# EAGLE board MCPTQFP100 (EAGLE 5.11)
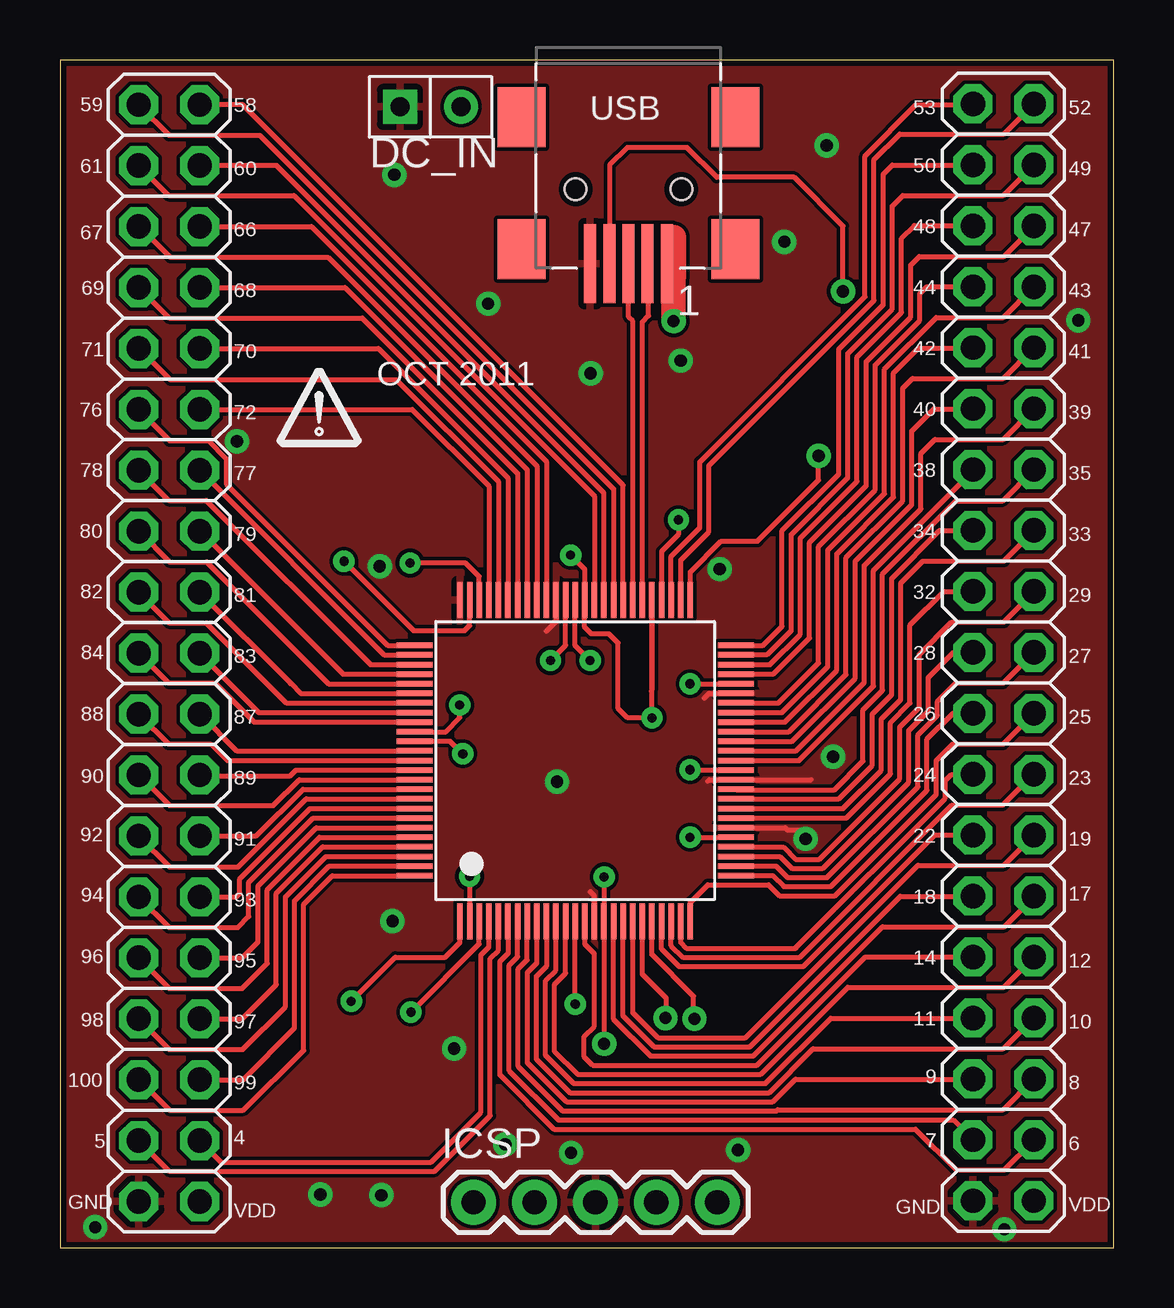
[diagram p0: board, top side]
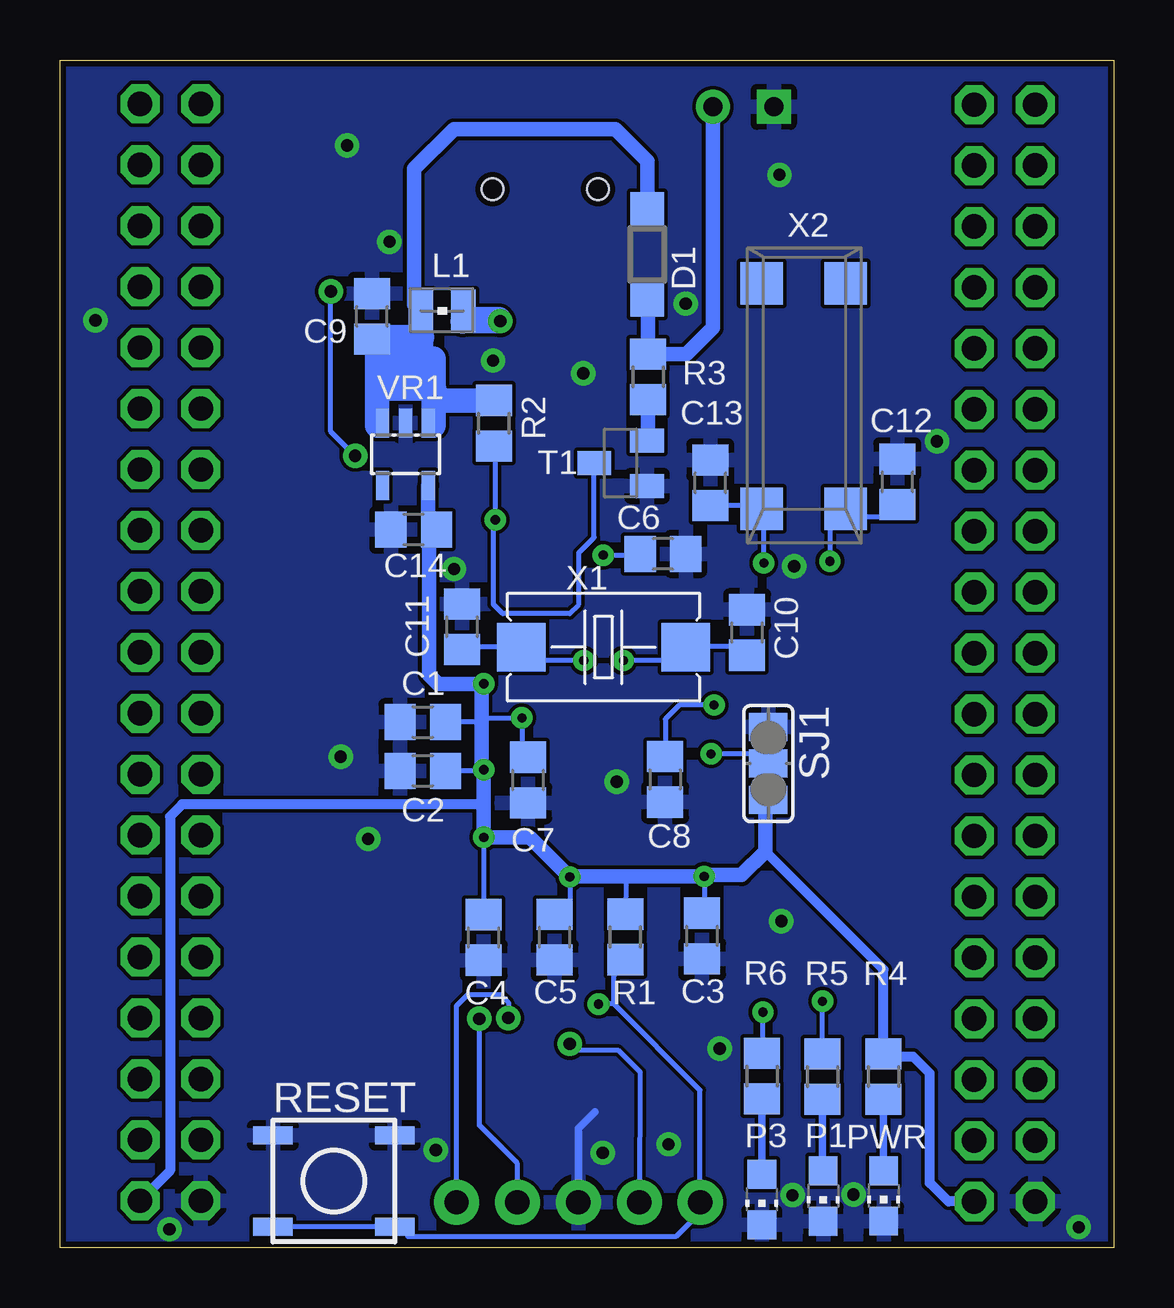
[diagram p1: board, bottom side, seen from below]

Size 43.93 x 49.52 mm. Coordinates in mm from the lower left corner, seen from the top.
Outline: 0,0 43.93,0 43.93,49.52 0,49.52 0,0
Copper layers (1*16): Top 0.035mm / dielectric 1.5mm / Bottom 0.035mm
Design rules "SparkFun *": minimum track width 6mil, minimum drill 15mil, track to track 6mil, track to pad 6mil, pad to pad 6mil, via to via 6mil, smd to smd 6mil, copper to edge 10mil, drill to drill 8mil, minimum pad ring 12mil, minimum via ring 10mil, stop-mask expansion 4mil, vias tented up to drill 25mil, thermal gap 10mil

## Footprints (pad centres in the part's own frame; a part is rotated, then mirrored left to right if it is on the bottom)
C805 = smd 1.3 x 1.5: 1 -0.95,0; 2 0.95,0
SOD123 = smd 1.4 x 1.4: A 1.9,0; C -1.9,0
M1X2 = drill 0.8 square: 1 -1.27,0 | drill 0.8 round: 2 1.27,0
DP_DEVICES_TQFP100-12MMX12MM = smd 0.23 x 1.5: P1 -4.8,-6.7; P2 -4.4,-6.7; P3 -4,-6.7; P4 -3.6,-6.7; P5 -3.2,-6.7; P6 -2.8,-6.7; P7 -2.4,-6.7; P8 -2,-6.7; P9 -1.6,-6.7; P10 -1.2,-6.7; P11 -0.8,-6.7; P12 -0.4,-6.7; P13 0,-6.7; P14 0.4,-6.7; P15 0.8,-6.7; P16 1.2,-6.7; P17 1.6,-6.7; P18 2,-6.7; P19 2.4,-6.7; P20 2.8,-6.7; P21 3.2,-6.7; P22 3.6,-6.7; P23 4,-6.7; P24 4.4,-6.7; P25 4.8,-6.7; P51 4.8,6.7; P52 4.4,6.7; P53 4,6.7; P54 3.6,6.7; P55 3.2,6.7; P56 2.8,6.7; P57 2.4,6.7; P58 2,6.7; P59 1.6,6.7; P60 1.2,6.7; P61 0.8,6.7; P62 0.4,6.7; P63 0,6.7; P64 -0.4,6.7; P65 -0.8,6.7; P66 -1.2,6.7; P67 -1.6,6.7; P68 -2,6.7; P69 -2.4,6.7; P70 -2.8,6.7; P71 -3.2,6.7; P72 -3.6,6.7; P73 -4,6.7; P74 -4.4,6.7; P75 -4.8,6.7 | smd 1.5 x 0.23: P26 6.7,-4.8; P27 6.7,-4.4; P28 6.7,-4; P29 6.7,-3.6; P30 6.7,-3.2; P31 6.7,-2.8; P32 6.7,-2.4; P33 6.7,-2; P34 6.7,-1.6; P35 6.7,-1.2; P36 6.7,-0.8; P37 6.7,-0.4; P38 6.7,0; P39 6.7,0.4; P40 6.7,0.8; P41 6.7,1.2; P42 6.7,1.6; P43 6.7,2; P44 6.7,2.4; P45 6.7,2.8; P46 6.7,3.2; P47 6.7,3.6; P48 6.7,4; P49 6.7,4.4; P50 6.7,4.8; P76 -6.7,4.8; P77 -6.7,4.4; P78 -6.7,4; P79 -6.7,3.6; P80 -6.7,3.2; P81 -6.7,2.8; P82 -6.7,2.4; P83 -6.7,2; P84 -6.7,1.6; P85 -6.7,1.2; P86 -6.7,0.8; P87 -6.7,0.4; P88 -6.7,0; P89 -6.7,-0.4; P90 -6.7,-0.8; P91 -6.7,-1.2; P92 -6.7,-1.6; P93 -6.7,-2; P94 -6.7,-2.4; P95 -6.7,-2.8; P96 -6.7,-3.2; P97 -6.7,-3.6; P98 -6.7,-4; P99 -6.7,-4.4; P100 -6.7,-4.8
1X05 = drill 1.016 pad 1.88 round: 1 0,0; 2 2.54,0; 3 5.08,0; 4 7.62,0; 5 10.16,0
2X19 = drill 1.016 octagon: 1 -22.86,-1.27; 2 -22.86,1.27; 3 -20.32,-1.27; 4 -20.32,1.27; 5 -17.78,-1.27; 6 -17.78,1.27; 7 -15.24,-1.27; 8 -15.24,1.27; 9 -12.7,-1.27; 10 -12.7,1.27; 11 -10.16,-1.27; 12 -10.16,1.27; 13 -7.62,-1.27; 14 -7.62,1.27; 15 -5.08,-1.27; 16 -5.08,1.27; 17 -2.54,-1.27; 18 -2.54,1.27; 19 0,-1.27; 20 0,1.27; 21 2.54,-1.27; 22 2.54,1.27; 23 5.08,-1.27; 24 5.08,1.27; 25 7.62,-1.27; 26 7.62,1.27; 27 10.16,-1.27; 28 10.16,1.27; 29 12.7,-1.27; 30 12.7,1.27; 31 15.24,-1.27; 32 15.24,1.27; 33 17.78,-1.27; 34 17.78,1.27; 35 20.32,-1.27; 36 20.32,1.27; 37 22.86,-1.27; 38 22.86,1.27
WE-KI_0805_B = smd 1.02 x 1.78: 1 -0.89,0; 2 0.89,0
CHIP-LED0805 = smd 1.2 x 1.2: A 0,-1.05; C 0,1.05
R805 = smd 1.3 x 1.5: 1 -0.95,0; 2 0.95,0
TACT_SWITCH_SMALL = smd 1.651 x 0.762: 1 -2.54,1.905; 2 2.54,1.905; 3 -2.54,-1.905; 4 2.54,-1.905
SJ_2 = smd 1.168 x 1.6: 1 -1.524,0; 2 0,0; 3 1.524,0
SOT23-EBC = smd 1 x 1.4: B 0.95,-1.1; C 0,1.1; E -0.95,-1.1
CONN_USB_MINI-B = smd 2 x 2.5: BODY@1 -4.45,2.5; BODY@2 4.45,2.5; BODY@3 4.45,-3; BODY@4 -4.45,-3 | smd 0.5 x 3.3: D+ 0,3.1; D- -0.8,3.1; GND 1.6,3.1; ID 0.8,3.1; VUSB -1.6,3.1 | hole 0.9: -2.2,0; 2.2,0
SOT-23-5 = smd 0.55 x 1.2: 1 -0.95,-1.3; 2 0,-1.3; 3 0.95,-1.3; 4 0.95,1.3; 5 -0.95,1.3
5X8 = smd 2.032 x 2.032: 1 -3.429,0; 2 3.429,0
CM309S = smd 1.778 x 1.778: 1 -4.7,-1.75; 2 4.7,-1.75; 3 4.7,1.75; 4 -4.7,1.75

## Placement (x,y rotation side)
C1  0.1uF  [C805]  28.8,21.92 0 bottom
C2  0.1uF  [C805]  28.8,19.89 0 bottom
C3  0.1uF  [C805]  17.16,13 90 bottom
C4  0.1uF  [C805]  26.26,12.95 90 bottom
C5  0.1uF  [C805]  23.31,12.95 90 bottom
C6  0.1uF  [C805]  18.8,28.93 180 bottom
C7  0.1uF  [C805]  24.41,19.51 90 bottom
C8  10uF  [C805]  18.7,19.53 270 bottom
C9  10uF  [C805]  30.92,38.83 90 bottom
C10  10uF  [C805]  15.28,25.65 90 bottom
C11  10uF  [C805]  27.17,25.9 90 bottom
C12  10uF  [C805]  9.02,31.93 90 bottom
C13  10uF  [C805]  16.82,31.9 90 bottom
C14  1uF  [C805]  29.18,29.94 180 bottom
D1  [SOD123]  19.45,41.41 270 bottom
DC_IN  HEADER1X2PTH  [M1X2]  15.44,47.57 0 top
IC1  PIC24FJ256GB210  [DP_DEVICES_TQFP100-12MMX12MM]  21.48,20.32 0 top
ICSP  [1X05]  17.24,1.91 0 top
JP1  [2X19]  39.33,24.83 270 top
JP2  [2X19]  4.55,24.8 270 top
L1  [WE-KI_0805_B]  28,39.06 0 bottom
P1  P4  [CHIP-LED0805]  12.12,2.17 180 bottom
P3  P4  [CHIP-LED0805]  14.67,2.02 180 bottom
PWR  P4  [CHIP-LED0805]  9.6,2.17 180 bottom
R1  2K  [R805]  20.36,12.97 90 bottom
R2  100k  [R805]  25.84,34.38 270 bottom
R3  2k  [R805]  19.42,36.32 270 bottom
R4  300  [R805]  9.6,7.14 90 bottom
R5  300  [R805]  12.14,7.14 90 bottom
R6  300  [R805]  14.67,7.16 90 bottom
RESET  [TACT_SWITCH_SMALL]  32.51,2.79 0 bottom
SJ1  [SJ_2]  14.4,20.19 270 bottom
T1  [SOT23-EBC]  20.56,32.72 90 bottom
U$1  DINA4_L  [DP_LOGO]  10.79,34.04 0 top
USB  CON-USB-MINI-BUSB1  [CONN_USB_MINI-B]  23.7,44.13 180 top
VR1  [SOT-23-5]  29.53,33.08 180 bottom
X1  OSC-XTAL28M_  [5X8]  21.27,25.04 180 bottom
X2  OSC-32.768  [CM309S]  12.93,35.51 90 bottom

## Library data of the parts
C1-C14 DC_IN R1-R6 RESET T1 U$1 USB VR1 X1 = dp_devices
D1 = diode
IC1 JP1 JP2 X2 = fica
ICSP = SparkFun
L1 = wuerth-elektronik
P1 P3 PWR = led
SJ1 = jumper

## Nets
1: IC1.P1 R5.2
3: IC1.P3 R6.2
4: IC1.P4 JP2.36
5: IC1.P5 JP2.35
6: IC1.P6 JP1.36
7: IC1.P7 JP1.35
8: IC1.P8 JP1.34
9: IC1.P9 JP1.33
10: IC1.P10 JP1.32
11: IC1.P11 JP1.31
12: IC1.P12 JP1.30
14: IC1.P14 JP1.29
17: IC1.P17 JP1.28
18: IC1.P18 JP1.27
19: IC1.P19 JP1.26
22: IC1.P22 JP1.25
23: IC1.P23 JP1.24
24: IC1.P24 JP1.23
25: IC1.P25 JP1.22
26: IC1.P26 JP1.21
27: IC1.P27 JP1.20
28: IC1.P28 JP1.19
29: IC1.P29 JP1.18
32: IC1.P32 JP1.17
33: IC1.P33 JP1.16
34: IC1.P34 JP1.15
35: IC1.P35 JP1.14
38: IC1.P38 JP1.13
39: IC1.P39 JP1.12
40: IC1.P40 JP1.11
41: IC1.P41 JP1.10
42: IC1.P42 JP1.9
43: IC1.P43 JP1.8
44: IC1.P44 JP1.7
47: IC1.P47 JP1.6
48: IC1.P48 JP1.5
49: IC1.P49 JP1.4
50: IC1.P50 JP1.3
52: IC1.P52 JP1.2
53: IC1.P53 JP1.1
58: IC1.P58 JP2.2
59: IC1.P59 JP2.1
60: IC1.P60 JP2.4
61: IC1.P61 JP2.3
66: IC1.P66 JP2.6
67: IC1.P67 JP2.5
68: IC1.P68 JP2.8
69: IC1.P69 JP2.7
70: IC1.P70 JP2.10
71: IC1.P71 JP2.9
72: IC1.P72 JP2.12
76: IC1.P76 JP2.11
77: IC1.P77 JP2.14
78: IC1.P78 JP2.13
79: IC1.P79 JP2.16
80: IC1.P80 JP2.15
81: IC1.P81 JP2.18
82: IC1.P82 JP2.17
83: IC1.P83 JP2.20
84: IC1.P84 JP2.19
87: IC1.P87 JP2.22
88: IC1.P88 JP2.21
89: IC1.P89 JP2.24
90: IC1.P90 JP2.23
91: IC1.P91 JP2.26
92: IC1.P92 JP2.25
93: IC1.P93 JP2.28
94: IC1.P94 JP2.27
95: IC1.P95 JP2.30
96: IC1.P96 JP2.29
97: IC1.P97 JP2.32
98: IC1.P98 JP2.31
99: IC1.P99 JP2.34
100: IC1.P100 JP2.33
D+: IC1.P57 USB.D+
D-: IC1.P56 USB.D-
DCIN: D1.A DC_IN.2 R3.1
GND: C1.1 C2.1 C3.1 C4.1 C5.1 C6.1 C7.1 C8.2 C9.2 C10.2 C11.2 C12.2 C13.2 C14.2 DC_IN.1 IC1.P15 IC1.P31 IC1.P36 IC1.P45 IC1.P65 IC1.P75 ICSP.3 JP1.37 JP2.37 P1.C P3.C PWR.C RESET.1 RESET.2 SJ1.1 T1.E USB.GND VR1.2
N$1: C8.1 IC1.P85
N$2: R3.2 T1.B
N$3: IC1.P86 SJ1.2
N$6: PWR.A R4.1
N$7: P1.A R5.1
N$8: P3.A R6.1
OSCI: C11.1 IC1.P63 X1.2
OSCO: C10.1 IC1.P64 X1.1
PGC: IC1.P20 ICSP.5
PGD: IC1.P21 ICSP.4
SOSCI: C13.1 IC1.P73 X2.4
SOSCO: C12.1 IC1.P74 X2.1
USBID: IC1.P51 USB.ID
VBUS: IC1.P54 R2.2 T1.C
VDD: C1.2 C2.2 C3.2 C4.2 C5.2 C6.2 C7.2 C14.1 IC1.P2 IC1.P16 IC1.P30 IC1.P37 IC1.P46 IC1.P55 IC1.P62 ICSP.2 JP1.38 JP2.38 R1.2 R4.2 SJ1.3 VR1.5
VUSB: C9.1 D1.C L1.1 R2.1 VR1.1 VR1.3
VUSBO: L1.2 USB.VUSB
~MCLR: IC1.P13 ICSP.1 R1.1 RESET.3 RESET.4

## Tracks (layer width: path | path; a pad name or v marks a point on that pad's centre or on a via)
1  (via drill 0.38)
  Top 0.203: IC1.P1 16.68,12.74 16.05,12.12 13.97,12.12 v12.14,10.29
  Bottom 0.203: R5.2 v12.14,10.29
3  (via drill 0.38)
  Top 0.203: IC1.P3 17.48,12.68 v14.63,9.83
  Bottom 0.203: v14.63,9.83 14.63,8.15 R6.2
4
  Top 0.203: IC1.P4 17.88,12.54 17.55,12.22 17.55,5.66 15.47,3.58 6.72,3.58 JP2.36
5
  Top 0.203: IC1.P5 18.28,12.41 17.93,12.07 17.93,5.51 15.62,3.2 4.55,3.2 JP2.35
6
  Top 0.203: JP1.36 40.6,4.48 39.37,3.25 37.36,3.25 35.66,4.95 20.6,4.95 18.34,7.21 18.34,11.94 18.69,12.29 18.69,13.6 IC1.P6
7
  Top 0.203: IC1.P7 19.08,12.14 18.72,11.79 18.72,7.39 20.78,5.33 37.23,5.33 JP1.35
8
  Top 0.203: JP1.34 39.32,5.77 29.92,5.77 29.87,5.72 20.96,5.72 19.1,7.57 19.1,11.63 19.48,12.01 IC1.P8
9
  Top 0.203: IC1.P9 19.88,11.87 19.48,11.48 19.48,7.72 21.11,6.1 29.72,6.1 30.66,7.04 38.04,7.04 JP1.33
10
  Top 0.203: JP1.32 39.32,8.31 31.39,8.31 29.57,6.48 21.26,6.48 19.86,7.87 19.86,11.33 20.29,11.76 20.29,13.6 IC1.P10
11
  Top 0.203: IC1.P11 20.68,11.58 20.24,11.15 20.24,8.03 21.41,6.86 29.41,6.86 32.13,9.58 38.04,9.58 JP1.31
12
  Top 0.203: IC1.P12 21.08,11.45 20.63,11 20.63,8.18 21.56,7.24 29.21,7.24 32.84,10.87 39.34,10.87 JP1.30
14
  Top 0.203: JP1.29 33.57,12.13 29.06,7.62 22.2,7.62 21.84,7.98 21.84,8.81 22.28,9.25 22.28,12.27 21.9,12.65 21.9,13.6 IC1.P14
17
  Top 0.203: IC1.P17 23.08,9.54 24.61,8 28.91,8 34.29,13.39 39.37,13.39 40.6,14.61 JP1.28
18
  Top 0.203: IC1.P18 23.48,9.67 24.77,8.38 28.75,8.38 35.03,14.66 38.04,14.66 JP1.27
19
  Top 0.203: IC1.P19 23.88,9.8 24.92,8.76 28.58,8.76 35.76,15.95 39.34,15.95 JP1.26
22
  Top 0.203: JP1.25 36.46,17.21 30.99,11.73 25.81,11.73 25.07,12.47 IC1.P22
23
  Top 0.203: JP1.24 40.58,19.75 39.29,18.47 37.19,18.47 30.84,12.12 25.96,12.12 25.48,12.6 IC1.P23
24
  Top 0.203: IC1.P24 25.88,12.73 26.11,12.5 30.68,12.5 30.68,12.52 36.91,18.75 36.91,19.48 37.16,19.74 38.04,19.74 JP1.23
25
  Top 0.203: IC1.P25 26.28,14.41 27,15.14 29.54,15.14 30,14.68 32.31,14.68 36.53,18.9 36.53,20.32 37.21,21.01 39.32,21.01 JP1.22
26
  Top 0.203: IC1.P26 29.72,15.52 30.18,15.06 32.13,15.06 36.14,19.08 36.14,21.21 37.24,22.3 38.04,22.3 JP1.21
27
  Top 0.203: JP1.20 39.32,23.55 37.34,23.55 36.58,22.78 36.58,22.2 35.76,21.39 35.76,19.23 31.98,15.44 30.33,15.44 29.85,15.92 IC1.P27
28
  Top 0.203: IC1.P28 30.01,16.32 30.51,15.82 31.8,15.82 35.38,19.41 35.38,21.56 36.2,22.38 36.2,23.77 37.26,24.84 38.04,24.84 JP1.19
29
  Top 0.203: JP1.18 40.6,27.34 39.34,26.09 37.16,26.09 35.81,24.74 35.81,22.53 35,21.72 35,19.56 31.65,16.21 30.66,16.21 30.15,16.71 IC1.P29
32
  Top 0.203: IC1.P32 32.78,17.92 34.62,19.76 34.62,21.89 35.43,22.71 35.43,25.96 36.84,27.37 JP1.17
33
  Top 0.203: JP1.16 40.6,29.88 39.34,28.63 35.97,28.63 35.05,27.71 35.05,22.86 34.24,22.05 34.24,19.91 32.64,18.31 IC1.P33
34
  Top 0.203: JP1.15 36.67,29.91 34.67,27.91 34.67,23.06 33.86,22.25 33.86,20.12 32.46,18.72 IC1.P34
  Top 0.305: JP1.15 38.02,29.94
35
  Top 0.203: JP1.14 39.29,31.14 37.34,31.14 34.29,28.09 34.29,23.24 33.48,22.43 33.48,20.29 32.28,19.1 28.2,19.1 IC1.P35
38
  Top 0.203: IC1.P38 30.81,20.32 33.91,23.42 33.91,28.24 38.13,32.46 38.04,32.46 JP1.13
39
  Top 0.203: JP1.12 39.32,33.71 36.47,33.71 35.89,33.12 35.89,30.81 33.53,28.45 33.53,23.57 30.68,20.73 28.18,20.73 IC1.P39
40
  Top 0.203: IC1.P40 30.52,21.12 33.15,23.75 33.15,28.63 35.51,30.99 35.51,34.06 36.42,34.98 38.04,34.98 JP1.11
41
  Top 0.203: JP1.10 39.32,36.25 35.53,36.25 35.13,35.84 35.13,31.14 32.77,28.78 32.77,23.9 30.38,21.51 IC1.P41
42
  Top 0.203: IC1.P42 30.23,21.92 32.39,24.08 32.39,28.93 34.75,31.29 34.75,36.47 35.79,37.52 38.04,37.52 JP1.9
43
  Top 0.203: IC1.P43 30.09,22.32 32,24.23 32,29.08 34.37,31.45 34.37,36.63 36.53,38.79 39.32,38.79 JP1.8
44
  Top 0.203: JP1.7 36.13,40.07 35.84,39.78 35.84,38.66 33.99,36.8 33.99,31.6 31.62,29.24 31.62,24.38 29.95,22.71 IC1.P44
47
  Top 0.203: JP1.6 40.6,42.58 39.34,41.33 35.81,41.33 35.46,40.97 35.46,38.81 33.6,36.96 33.6,31.78 31.24,29.41 31.24,25.43 29.74,23.93 IC1.P47
48
  Top 0.203: IC1.P48 29.6,24.32 30.86,25.58 30.86,29.59 33.22,31.95 33.22,37.13 35.08,38.99 35.08,42.09 35.61,42.62 38.04,42.62 JP1.5
49
  Top 0.203: JP1.4 39.32,43.87 35.13,43.87 34.7,43.43 34.7,39.14 32.84,37.29 32.84,32.11 30.48,29.74 30.48,25.73 29.49,24.74 28.2,24.74 IC1.P49
50
  Top 0.203: IC1.P50 29.31,25.12 30.1,25.91 30.1,29.9 32.46,32.26 32.46,37.47 34.32,39.32 34.32,44.75 34.7,45.14 38.04,45.14 JP1.3
52
  Top 0.203: JP1.2 39.34,46.43 35,46.43 33.93,45.36 33.93,39.5 27.05,32.61 27.05,29.85 25.88,28.68 25.88,27.03 IC1.P52
53
  Top 0.203: IC1.P53 25.48,28.83 26.67,30.02 26.67,32.77 33.55,39.65 33.55,45.52 35.69,47.65 38.02,47.65 JP1.1
58
  Top 0.203: JP2.2 7.61,47.66 23.48,31.79 IC1.P58
59
  Top 0.203: JP2.1 3.28,47.64 4.55,46.38 8.33,46.38 23.08,31.64 IC1.P59
60
  Top 0.203: JP2.4 9.04,45.12 22.68,31.48 IC1.P60
61
  Top 0.203: JP2.3 4.52,43.87 9.75,43.87 22.28,31.34 IC1.P61
66
  Top 0.203: JP2.6 10.48,42.58 20.28,32.79 IC1.P66
67
  Top 0.203: IC1.P67 19.88,32.6 11.18,41.3 4.6,41.3 3.32,42.58 JP2.5
68
  Top 0.203: JP2.8 11.88,40.04 19.48,32.44 IC1.P68
69
  Top 0.203: JP2.7 4.55,38.76 12.6,38.76 19.08,32.28 IC1.P69
70
  Top 0.203: IC1.P70 18.68,32.1 13.28,37.5 JP2.10
71
  Top 0.203: JP2.9 3.3,37.5 4.6,36.2 14.02,36.2 18.28,31.94 IC1.P71
72
  Top 0.203: IC1.P72 17.88,31.76 14.68,34.95 JP2.12
76
  Top 0.203: JP2.11 3.28,34.94 4.57,33.66 6.17,33.66 6.93,32.89 6.93,31.85 13.67,25.12 IC1.P76
77
  Top 0.203: IC1.P77 13.52,24.72 JP2.14
78
  Top 0.203: JP2.13 3.28,32.4 4.52,31.17 6.1,31.17 12.94,24.32 IC1.P78
79
  Top 0.203: JP2.16 5.84,29.88 11.79,23.92 IC1.P79
80
  Top 0.203: JP2.15 3.3,29.88 4.57,28.6 6.12,28.6 11.2,23.52 IC1.P80
81
  Top 0.203: JP2.18 5.82,27.32 9.63,23.52 | 9.63,23.52 9.6,23.52 | IC1.P81 10.03,23.12 9.63,23.52
82
  Top 0.203: JP2.17 3.28,27.32 4.55,26.06 6.1,26.06 9.44,22.72 IC1.P82
83
  Top 0.203: JP2.20 8.29,22.32 IC1.P83
84
  Top 0.203: IC1.P84 8.1,21.92 6.48,23.55 4.53,23.55 JP2.19
87
  Top 0.203: JP2.22 5.84,22.26 7.37,20.72 IC1.P87
88
  Top 0.203: JP2.21 4.52,21.01 6.3,21.01 6.99,20.32 IC1.P88
89
  Top 0.203: IC1.P89 9.84,19.92 9.6,19.69 5.86,19.69 JP2.24
90
  Top 0.203: JP2.23 3.3,19.72 4.57,18.44 8.89,18.44 9.97,19.52 IC1.P90
91
  Top 0.203: IC1.P91 10.13,19.12 8.19,17.18 JP2.26
92
  Top 0.203: JP2.25 3.28,17.16 4.57,15.88 7.42,15.88 10.26,18.72 IC1.P92
93
  Top 0.203: JP2.28 7.35,14.64 7.49,14.78 7.49,15.39 10.42,18.32 IC1.P93
94
  Top 0.203: JP2.27 4.55,13.36 7.42,13.36 7.87,13.82 7.87,15.24 10.55,17.92 IC1.P94
95
  Top 0.203: IC1.P95 10.69,17.52 8.26,15.09 8.26,12.75 7.59,12.09 JP2.30
96
  Top 0.203: IC1.P96 10.82,17.12 8.64,14.94 8.64,11.86 7.59,10.82 4.55,10.82 3.28,12.08 JP2.29
97
  Top 0.203: IC1.P97 10.95,16.72 9.02,14.78 9.02,10.97 7.6,9.56 JP2.32
98
  Top 0.203: IC1.P98 11.09,16.32 9.4,14.63 9.4,10.06 7.62,8.28 4.55,8.28 JP2.31
99
  Top 0.203: IC1.P99 11.22,15.92 9.78,14.48 9.78,9.17 7.63,7.02 JP2.34
100
  Top 0.203: JP2.33 3.3,7.02 4.57,5.74 7.65,5.74 10.16,8.23 10.16,14.33 11.35,15.52 IC1.P100
D+
  Top 0.203: IC1.P57 23.88,38.63 23.7,38.81 USB.D+
D-
  Top 0.203: IC1.P56 24.28,38.6 24.54,38.86 24.54,41.02
  Top 0.254: 24.54,41.02 USB.D-
DCIN
  Bottom 0.61: DC_IN.2 16.71,38.35 17.81,37.26 R3.1 | R3.1 | R3.1 19.41,39.48 D1.A
GND  (via drill 0.51)
  Top 0.203: IC1.P31 30.23,17.52 30.33,17.42 30.84,17.42 31.16,17.1 | 31.32,19.52 IC1.P36 27.06,19.52 27,19.46 | IC1.P45 27.06,23.12 26.85,22.91 | IC1.P15 22.28,14.68 22.1,14.86 | IC1.P65 20.68,26.11 20.27,25.7 | 37.8,1.71 JP1.37
  Bottom 0.305: 21.62,5.68 22.32,4.98 ICSP.3
  other vias: 30.19,41.94 31.96,45.95 13.33,28.42 13.94,44.74 20.72,19.44 42.45,38.67 32.23,20.48 31.08,17.05 28.26,4.08 1.47,0.87 21.3,3.97 18.56,4.32 16.43,8.31 13.86,13.62 22.12,36.46 27.5,28.3 25.88,36.99 10.85,2.23 7.37,33.62 17.85,39.36 13.39,2.2 39.36,0.78
  pour Top: -0.13,49.53 43.94,49.53 43.94,0 -0.13,0
  pour Bottom: 43.94,49.53 43.94,0 -0.13,0 -0.13,49.53
N$1  (via drill 0.38)
  Top 0.203: IC1.P85 16.08,21.52 16.66,22.1 v16.66,22.63
  Bottom 0.203: 16.66,22.58 v16.66,22.63 18.11,22.63 18.69,22.05 C8.1
N$2
  Bottom 0.61: R3.2 19.42,33.71 T1.B
N$3  (via drill 0.38)
  Top 0.203: IC1.P86 16.27,21.12 v16.79,20.6
  Bottom 0.203: v16.79,20.6 14.81,20.6 SJ1.2
N$6
  Bottom 0.305: PWR.A 9.6,3.44 R4.1
N$7
  Bottom 0.305: R5.1 12.14,3.31 P1.A
N$8
  Bottom 0.305: P3.A 14.67,4.51 R6.1
OSCI  (via drill 0.38)
  Top 0.203: IC1.P63 21.48,25.11 v22.1,24.49
  Bottom 0.203: v22.1,24.49 24.14,24.49 X1.2 26.48,25.04 C11.1
OSCO  (via drill 0.38)
  Top 0.203: IC1.P64 21.08,25.11 v20.45,24.49
  Bottom 0.203: v20.45,24.49 18.4,24.49 X1.1 17.82,25.07 15.65,25.07 C10.1
PGC  (via drill 0.51)
  Top 0.203: IC1.P20 24.28,11.41 25.27,10.41 25.27,9.62 v25.24,9.59
  Bottom 0.203: ICSP.5 27.4,10.08 26.92,10.57 25.58,10.57 25.24,10.23 v25.24,9.59
PGD  (via drill 0.51)
  Top 0.203: IC1.P21 24.68,12.23 26.42,10.49 26.42,9.59 v26.45,9.56
  Bottom 0.203: ICSP.4 24.86,3.02 24.86,3.52 26.45,5.11 v26.45,9.56
SOSCI  (via drill 0.38)
  Top 0.203: IC1.P73 17.48,27.99 16.92,28.55 v14.59,28.55
  Bottom 0.203: X2.4 | C13.1 14.82,30.95 X2.4 | v14.59,28.55 14.59,30.72 X2.4
SOSCO  (via drill 0.38)
  Top 0.203: IC1.P74 17.08,25.94 16.87,25.73 14.73,25.73 v11.84,28.63
  Bottom 0.203: v11.84,28.63 11.84,30.15 X2.1 10.85,30.48 9.53,30.48 C12.1
USBID  (via drill 0.51 pad 1.02)
  Top 0.203: IC1.P51 26.28,28.18 27.56,29.46 29.08,29.46 31.62,32 v31.62,33.02 | v32.64,39.88 32.64,42.6 30.61,44.63 27.38,44.63 26.14,45.87 23.65,45.87 22.91,45.14 22.91,41.83 23.04,41.71 23.04,41.17 USB.ID
  Bottom 0.203: v32.64,39.88 32.64,34.04 v31.62,33.02
VBUS  (via drill 0.38)
  Top 0.203: IC1.P54 25.08,29.04 25.78,29.74 v25.78,30.35
  Bottom 0.203: v25.78,30.35 25.78,33.37 R2.2 | T1.C 21.66,29.62 22.3,28.98 22.3,26.82 22.68,26.44 25.48,26.44 25.86,26.82 25.86,30.28 v25.78,30.35 | v25.78,30.35 25.81,30.33
VDD  (via drill 0.38, 0.51)
  Top 0.203: IC1.P46 26.7,23.52 v26.26,23.52 | IC1.P37 26.28,19.92 v26.26,19.94 | IC1.P30 v26.26,17.12 | v22.68,15.47 v22.68,15.46 IC1.P16 v22.68,8.52 v22.68,8.51 | IC1.P2 v17.08,15.49 v17.07,15.49 | v21.29,28.88 21.88,28.29 IC1.P62 21.87,25.88 22.15,25.6 22.89,25.6 23.27,25.22 23.27,22.49 23.66,22.1 v24.68,22.1 24.68,23.23 IC1.P55 24.68,23.25 24.64,23.22
  Bottom 0.203: ICSP.2 19.75,7.33 20.67,8.26 22.43,8.26 v22.68,8.51 | v26.26,23.52 26.67,23.52 | 26.26,19.91 v26.26,19.94 26.31,19.89 C2.2 | 26.21,17.12 v26.26,17.12 C4.2 | 22.66,15.49 v22.68,15.47 v22.68,15.46 IC1.P16 22.75,13.55 C5.2 | 17.04,15.54 17.08,15.51 v17.08,15.49 17.23,15.64 17.07,15.47 IC1.P2 C3.2 | 21.29,28.96 v21.29,28.88 19.8,28.88 C6.2 | 21.72,15.49 21.57,15.64 | 26.37,22.35 26.49,22.48 | 18.42,15.49 18.37,15.45 | R1.2 20.33,15.33 20.5,15.49 | C7.2 24.41,20.61 24.66,20.87 24.66,22.09 v24.68,22.1 26.14,22.1 26.37,21.87 26.42,21.92 C1.2
  Bottom 0.406: JP1.38 39.34,3.23 39.34,17.98 38.84,18.49 26.52,18.49 26.26,18.75 | JP2.38 6.89,1.94 7.67,2.72 7.67,7.29 8.36,7.98 9.48,7.98 R4.2 9.6,11.61 14.53,16.54
  Bottom 0.61: VR1.5 28.58,30.42 C14.1 28.23,29.82 28.55,29.5 28.55,23.89 IC1.P46 v26.26,23.52 26.37,23.62 26.37,22.35 26.37,21.87 26.37,20.04 v26.26,19.94 26.26,18.75 v26.26,17.12 | v26.26,17.12 24.33,17.12 v22.68,15.47 | 22.66,15.49 21.72,15.49 20.5,15.49 18.42,15.49 v17.08,15.49 | 17.04,15.54 15.52,15.54 14.53,16.54 14.53,18.54 SJ1.3
VUSB
  Bottom 0.203: R2.1
  Bottom 0.254: VR1.3 30.48,33.91 30.7,34.29 | 28.35,34.29 28.48,34.29 VR1.1
  Bottom 0.305: 30.61,37.97 30.54,38.04 C9.1
  Bottom 0.61: D1.C 19.45,45.31 20.78,46.63 27.51,46.63 29.16,44.98 29.16,39.33 L1.1
  Bottom 1.016: 30.7,35.81 30.7,34.29 | 28.38,35.81 28.83,35.81 | 28.83,35.81 30.7,35.81 | 28.38,35.81 28.32,35.75 | 28.35,35.81 28.38,35.81 | 28.35,35.33 28.35,34.29 | 28.35,35.33 28.35,35.81 | 30.7,35.81 30.7,37.88 30.61,37.97 | 28.35,35.81 28.35,37.07 | L1.1 28.86,35.85 28.83,35.81 | 30.61,37.97 28.83,37.97 | 30.61,37.97 30.73,37.97 | 30.61,37.97 30.61,37.08 28.96,37.08 28.96,36.58 30.35,36.58 | R2.1 25.73,35.33 | 25.73,35.33 25.6,35.33 | 25.73,35.33 28.35,35.33
VUSBO  (via drill 0.51)
  Top 0.254: 25.6,42.14 25.6,41.29 USB.VUSB
  Top 1.016: v25.58,38.63 25.6,42.14
  Bottom 0.305: L1.2 27.18,38.84 27.15,38.61
  Bottom 1.016: 27.15,38.61 v25.58,38.63 25.63,38.71 26.98,38.71 27.15,38.61
~MCLR  (via drill 0.38)
  Top 0.203: IC1.P13 v21.48,10.17 v21.49,10.16
  Bottom 0.203: ICSP.1 17.21,1.46 | ICSP.1 17.24,1.49 18.26,0.48 29.43,0.48 29.43,0.85 | RESET.4 RESET.3 | 20.84,10.17 v21.48,10.17 | 20.84,10.17 17.25,6.58 ICSP.1 | R1.1 20.39,11.79 20.83,11.35 20.83,10.19 20.84,10.17
  Bottom 0.305: 29.43,0.85 29.46,0.89 RESET.4

## Text on the board
tPlace: 7
tNames: 59 | 58 | 53 | 52 | 61 | 60 | 50 | 49 | 67 | 66 | 48 | 47 | 69 | 68 | 44 | 43 | 71 | 70 | 42 | 41 | OCT 2011 | 76 | 72 | 40 | 39 | 78 | 77 | 38 | 35 | 80 | 34 | 79 | 33 | 82 | 81 | 32 | 29 | 84 | 83 | 28 | 27 | 88 | 87 | 26 | 25 | 90 | 89 | 24 | 23 | 92 | 91 | 22 | 19 | 94 | 93 | 18 | 17 | 96 | 95 | 14 | 12 | 98 | 97 | 11 | 10 | 100 | 99 | 9 | 8 | 5 | 4 | 7 | 6 | GND | GND | VDD | VDD